# EAGLE board clvHd-Panel (EAGLE 9.6.2), part 1 of 3
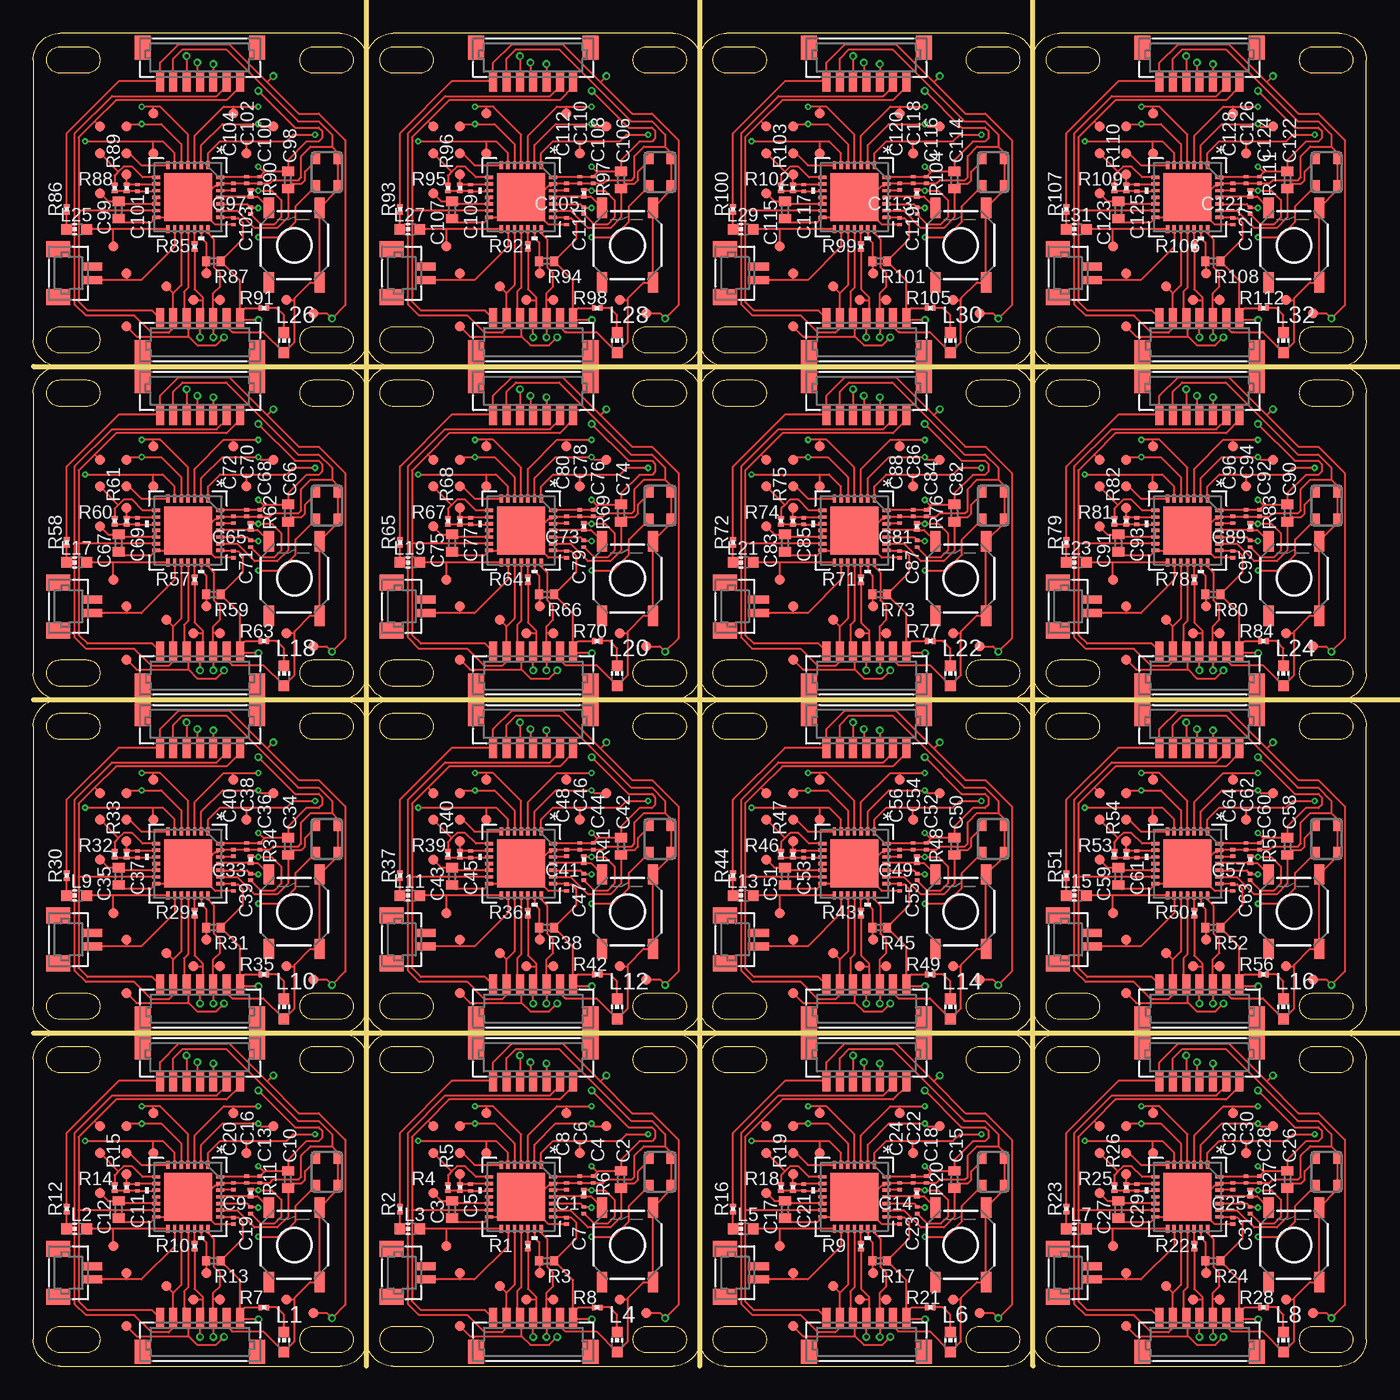
[diagram p0: board, top side]
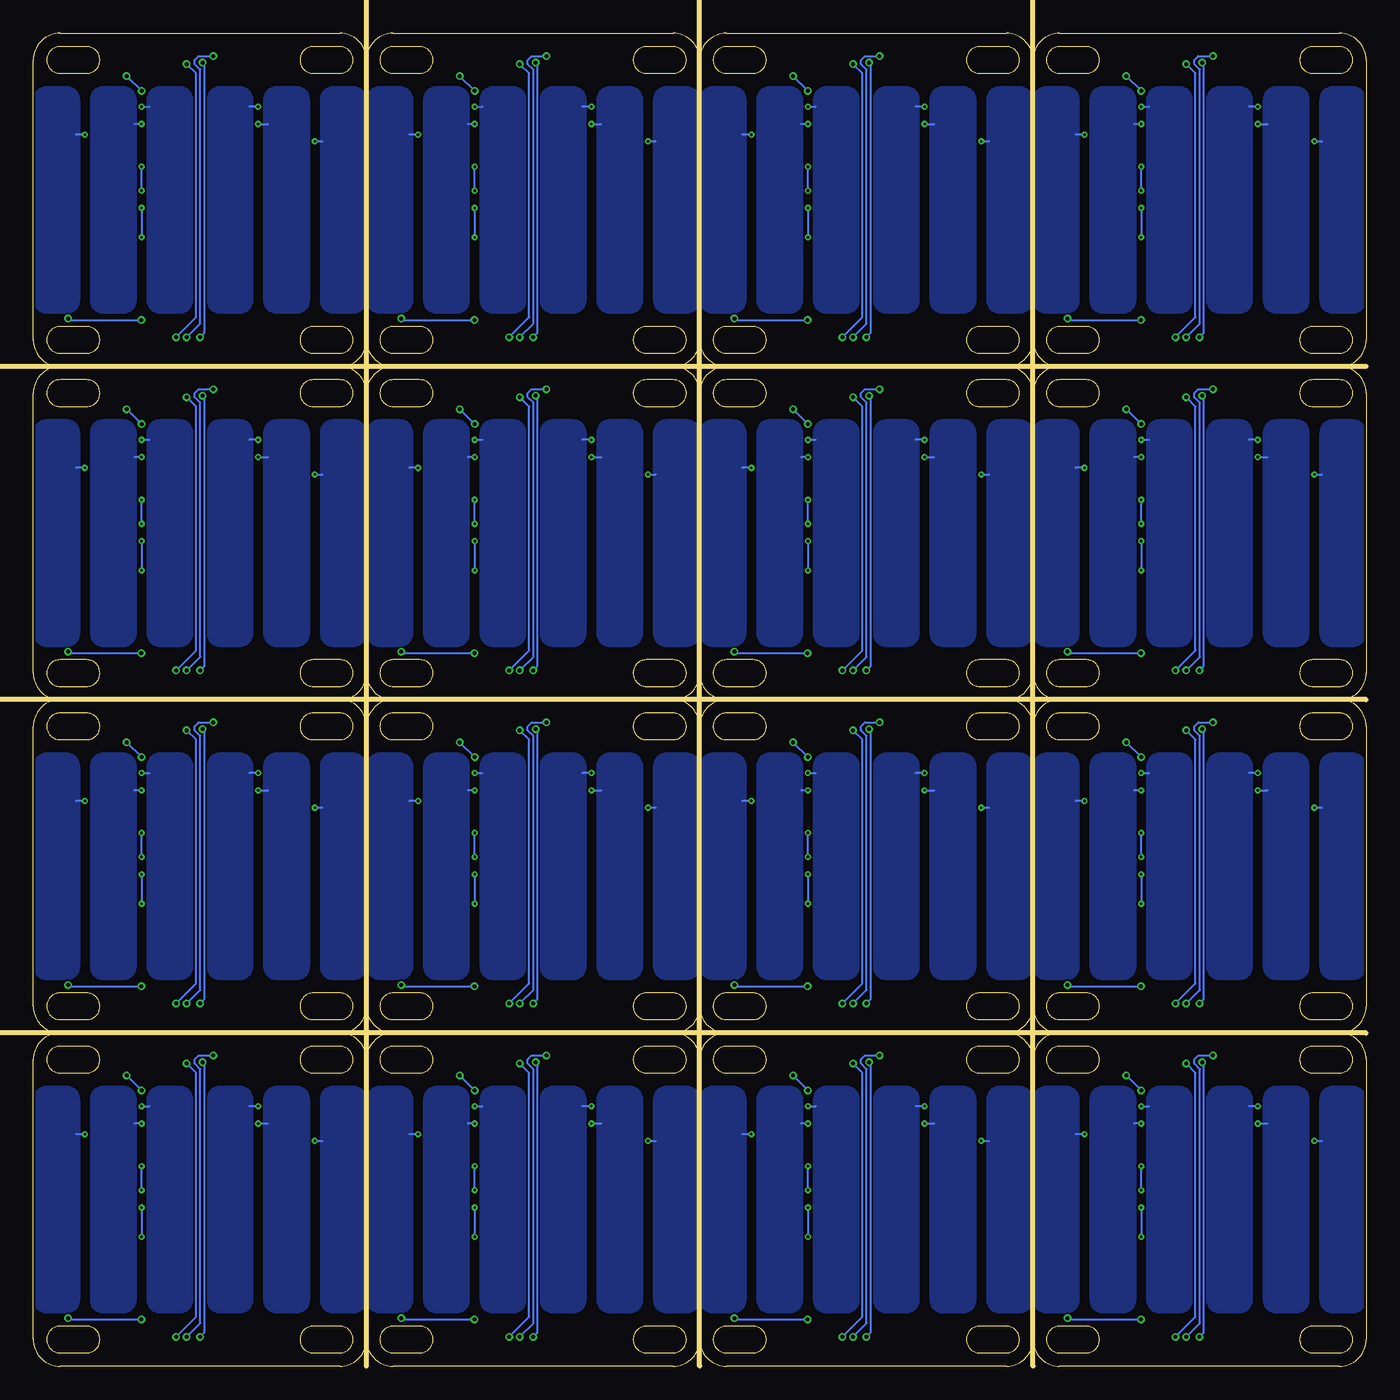
[diagram p1: board, bottom side, seen from below]

Size 100 x 100 mm. Coordinates in mm from the lower left corner, seen from the top.
Outline: 512 segments
Copper layers (1*16): Top 0.035mm / dielectric 1.5mm / Bottom 0.035mm
Design rules "clvHd": minimum track width 5mil, minimum drill 0.2mm, track to track 5mil, track to pad 5mil, pad to pad 5mil, via to via 5mil, smd to smd 5mil, copper to edge 7mil, drill to drill 7mil, minimum pad ring 5mil, minimum via ring 5mil, stop-mask expansion 2.5mil, vias tented up to drill 25mil, thermal gap 10mil
Milling: 6 lines

## Footprints (pad centres in the part's own frame; a part is rotated, then mirrored left to right if it is on the bottom)
C0201 = smd 0.25 x 0.35: 1 -0.25,0; 2 0.25,0
C0402 = smd 0.7 x 0.9: 1 -0.65,0; 2 0.65,0
CHIP-LED0603 = smd 0.8 x 0.8: A 0,-0.75; C 0,0.75
R0201 = smd 0.28 x 0.43: 1 -0.255,0; 2 0.255,0
R0402 = smd 0.6 x 0.7: 1 -0.55,0; 2 0.55,0
TACTILE-SWITCH-SMD = smd 1.524 x 0.762: 1 -2.794,1.905; 2 2.794,1.905; 3 -2.794,-1.905; 4 2.794,-1.905
PAD.03X.03 = smd 0.762 x 0.762: 1 0,0
RSG28_3P6X3P6_TEX = smd 0.6 x 0.25: 1 -2.4,1.5; 2 -2.4,1; 3 -2.4,0.5; 4 -2.4,0; 5 -2.4,-0.5; 6 -2.4,-1; 7 -2.4,-1.5; 15 2.4,-1.5; 16 2.4,-1; 17 2.4,-0.5; 18 2.4,0; 19 2.4,0.5; 20 2.4,1; 21 2.4,1.5 | smd 0.25 x 0.6: 8 -1.5,-2.4; 9 -1,-2.4; 10 -0.5,-2.4; 11 0,-2.4; 12 0.5,-2.4; 13 1,-2.4; 14 1.5,-2.4; 22 1.5,2.4; 23 1,2.4; 24 0.5,2.4; 25 0,2.4; 26 -0.5,2.4; 27 -1,2.4; 28 -1.5,2.4 | smd 3.6 x 3.6: 29 0,0
ASE = smd 0.9 x 0.65: 1 -1.05,-0.825; 2 1.05,-0.825; 3 1.05,0.825; 4 -1.05,0.825
BM02B-SRSS-TB = smd 0.6 x 1.55: 1 0.5,0; 2 -0.5,0 | smd 1.2 x 1.8: M1 1.8,-2.525; M2 -1.8,-2.525
BM07B-SRSS-TB = smd 0.6 x 1.55: 1 3,0; 2 2,0; 3 1,0; 4 0,0; 5 -1,0; 6 -2,0; 7 -3,0 | smd 1.2 x 1.8: M1 4.3,-2.525; M2 -4.3,-2.525

## Placement (x,y rotation side)
C1  22pF  [C0201]  41.3,11.7 90 top
C2  22pF  [C0402]  44.1,14 270 top
C3  100nF  [C0402]  31.4,11.75 270 top
C4  100nF  [C0201]  42,14 270 top
C5  1nF  [C0201]  32.8,13.4 90 top
C6  100nF  [C0201]  41,14 270 top
C7  100nF  [C0201]  40,10.9 270 top
C8  1000nF  [C0201]  40,13.5 90 top
C9  22pF  [C0201]  16.3,11.7 90 top
C10  22pF  [C0402]  19.1,14 270 top
C11  1nF  [C0201]  7.8,13.4 90 top
C12  100nF  [C0402]  6.4,11.75 270 top
C13  100nF  [C0201]  17,14 270 top
C14  22pF  [C0201]  66.3,11.7 90 top
C15  22pF  [C0402]  69.1,14 270 top
C16  100nF  [C0201]  16,14 270 top
C17  100nF  [C0402]  56.4,11.75 270 top
C18  100nF  [C0201]  67,14 270 top
C19  100nF  [C0201]  15,10.9 270 top
C20  1000nF  [C0201]  15,13.5 90 top
C21  1nF  [C0201]  57.8,13.4 90 top
C22  100nF  [C0201]  66,14 270 top
C23  100nF  [C0201]  65,10.9 270 top
C24  1000nF  [C0201]  65,13.5 90 top
C25  22pF  [C0201]  91.3,11.7 90 top
C26  22pF  [C0402]  94.1,14 270 top
C27  100nF  [C0402]  81.4,11.75 270 top
C28  100nF  [C0201]  92,14 270 top
C29  1nF  [C0201]  82.8,13.4 90 top
C30  100nF  [C0201]  91,14 270 top
C31  100nF  [C0201]  90,10.9 270 top
C32  1000nF  [C0201]  90,13.5 90 top
C33  22pF  [C0201]  16.3,36.7 90 top
C34  22pF  [C0402]  19.1,39 270 top
C35  100nF  [C0402]  6.4,36.75 270 top
C36  100nF  [C0201]  17,39 270 top
C37  1nF  [C0201]  7.8,38.4 90 top
C38  100nF  [C0201]  16,39 270 top
C39  100nF  [C0201]  15,35.9 270 top
C40  1000nF  [C0201]  15,38.5 90 top
C41  22pF  [C0201]  41.3,36.7 90 top
C42  22pF  [C0402]  44.1,39 270 top
C43  100nF  [C0402]  31.4,36.75 270 top
C44  100nF  [C0201]  42,39 270 top
C45  1nF  [C0201]  32.8,38.4 90 top
C46  100nF  [C0201]  41,39 270 top
C47  100nF  [C0201]  40,35.9 270 top
C48  1000nF  [C0201]  40,38.5 90 top
C49  22pF  [C0201]  66.3,36.7 90 top
C50  22pF  [C0402]  69.1,39 270 top
C51  100nF  [C0402]  56.4,36.75 270 top
C52  100nF  [C0201]  67,39 270 top
C53  1nF  [C0201]  57.8,38.4 90 top
C54  100nF  [C0201]  66,39 270 top
C55  100nF  [C0201]  65,35.9 270 top
C56  1000nF  [C0201]  65,38.5 90 top
C57  22pF  [C0201]  91.3,36.7 90 top
C58  22pF  [C0402]  94.1,39 270 top
C59  100nF  [C0402]  81.4,36.75 270 top
C60  100nF  [C0201]  92,39 270 top
C61  1nF  [C0201]  82.8,38.4 90 top
C62  100nF  [C0201]  91,39 270 top
C63  100nF  [C0201]  90,35.9 270 top
C64  1000nF  [C0201]  90,38.5 90 top
C65  22pF  [C0201]  16.3,61.7 90 top
C66  22pF  [C0402]  19.1,64 270 top
C67  100nF  [C0402]  6.4,61.75 270 top
C68  100nF  [C0201]  17,64 270 top
C69  1nF  [C0201]  7.8,63.4 90 top
C70  100nF  [C0201]  16,64 270 top
C71  100nF  [C0201]  15,60.9 270 top
C72  1000nF  [C0201]  15,63.5 90 top
C73  22pF  [C0201]  41.3,61.7 90 top
C74  22pF  [C0402]  44.1,64 270 top
C75  100nF  [C0402]  31.4,61.75 270 top
C76  100nF  [C0201]  42,64 270 top
C77  1nF  [C0201]  32.8,63.4 90 top
C78  100nF  [C0201]  41,64 270 top
C79  100nF  [C0201]  40,60.9 270 top
C80  1000nF  [C0201]  40,63.5 90 top
C81  22pF  [C0201]  66.3,61.7 90 top
C82  22pF  [C0402]  69.1,64 270 top
C83  100nF  [C0402]  56.4,61.75 270 top
C84  100nF  [C0201]  67,64 270 top
C85  1nF  [C0201]  57.8,63.4 90 top
C86  100nF  [C0201]  66,64 270 top
C87  100nF  [C0201]  65,60.9 270 top
C88  1000nF  [C0201]  65,63.5 90 top
C89  22pF  [C0201]  91.3,61.7 90 top
C90  22pF  [C0402]  94.1,64 270 top
C91  100nF  [C0402]  81.4,61.75 270 top
C92  100nF  [C0201]  92,64 270 top
C93  1nF  [C0201]  82.8,63.4 90 top
C94  100nF  [C0201]  91,64 270 top
C95  100nF  [C0201]  90,60.9 270 top
C96  1000nF  [C0201]  90,63.5 90 top
C97  22pF  [C0201]  16.3,86.7 90 top
C98  22pF  [C0402]  19.1,89 270 top
C99  100nF  [C0402]  6.4,86.75 270 top
C100  100nF  [C0201]  17,89 270 top
C101  1nF  [C0201]  7.8,88.4 90 top
C102  100nF  [C0201]  16,89 270 top
C103  100nF  [C0201]  15,85.9 270 top
C104  1000nF  [C0201]  15,88.5 90 top
C105  22pF  [C0201]  41.3,86.7 90 top
C106  22pF  [C0402]  44.1,89 270 top
C107  100nF  [C0402]  31.4,86.75 270 top
C108  100nF  [C0201]  42,89 270 top
C109  1nF  [C0201]  32.8,88.4 90 top
C110  100nF  [C0201]  41,89 270 top
C111  100nF  [C0201]  40,85.9 270 top
C112  1000nF  [C0201]  40,88.5 90 top
C113  22pF  [C0201]  66.3,86.7 90 top
C114  22pF  [C0402]  69.1,89 270 top
C115  100nF  [C0402]  56.4,86.75 270 top
C116  100nF  [C0201]  67,89 270 top
C117  1nF  [C0201]  57.8,88.4 90 top
C118  100nF  [C0201]  66,89 270 top
C119  100nF  [C0201]  65,85.9 270 top
C120  1000nF  [C0201]  65,88.5 90 top
C121  22pF  [C0201]  91.3,86.7 90 top
C122  22pF  [C0402]  94.1,89 270 top
C123  100nF  [C0402]  81.4,86.75 270 top
C124  100nF  [C0201]  92,89 270 top
C125  1nF  [C0201]  82.8,88.4 90 top
C126  100nF  [C0201]  91,89 270 top
C127  100nF  [C0201]  90,85.9 270 top
C128  1000nF  [C0201]  90,88.5 90 top
L1  [CHIP-LED0603]  18.8,1.8 0 top
L2  [CHIP-LED0603]  3.26,10.3 90 top
L3  [CHIP-LED0603]  28.26,10.3 90 top
L4  [CHIP-LED0603]  43.8,1.8 0 top
L5  [CHIP-LED0603]  53.26,10.3 90 top
L6  [CHIP-LED0603]  68.8,1.8 0 top
L7  [CHIP-LED0603]  78.26,10.3 90 top
L8  [CHIP-LED0603]  93.8,1.8 0 top
L9  [CHIP-LED0603]  3.26,35.3 90 top
L10  [CHIP-LED0603]  18.8,26.8 0 top
L11  [CHIP-LED0603]  28.26,35.3 90 top
L12  [CHIP-LED0603]  43.8,26.8 0 top
L13  [CHIP-LED0603]  53.26,35.3 90 top
L14  [CHIP-LED0603]  68.8,26.8 0 top
L15  [CHIP-LED0603]  78.26,35.3 90 top
L16  [CHIP-LED0603]  93.8,26.8 0 top
L17  [CHIP-LED0603]  3.26,60.3 90 top
L18  [CHIP-LED0603]  18.8,51.8 0 top
L19  [CHIP-LED0603]  28.26,60.3 90 top
L20  [CHIP-LED0603]  43.8,51.8 0 top
L21  [CHIP-LED0603]  53.26,60.3 90 top
L22  [CHIP-LED0603]  68.8,51.8 0 top
L23  [CHIP-LED0603]  78.26,60.3 90 top
L24  [CHIP-LED0603]  93.8,51.8 0 top
L25  [CHIP-LED0603]  3.26,85.3 90 top
L26  [CHIP-LED0603]  18.8,76.8 0 top
L27  [CHIP-LED0603]  28.26,85.3 90 top
L28  [CHIP-LED0603]  43.8,76.8 0 top
L29  [CHIP-LED0603]  53.26,85.3 90 top
L30  [CHIP-LED0603]  68.8,76.8 0 top
L31  [CHIP-LED0603]  78.26,85.3 90 top
L32  [CHIP-LED0603]  93.8,76.8 0 top
R1  51  [R0201]  37.1,9 270 top
R2  400  [R0201]  27.5,11.8 90 top
R3  1M  [R0402]  38.5,7.9 0 top
R4  10k  [R0201]  31.1,13.4 270 top
R5  10M  [R0201]  32,13.4 270 top
R6  1M  [R0201]  41.3,13 90 top
R7  400  [R0201]  17.3,4.4 0 top
R8  400  [R0201]  42.3,4.4 0 top
R9  51  [R0201]  62.1,9 270 top
R10  51  [R0201]  12.1,9 270 top
R11  1M  [R0201]  16.3,13 90 top
R12  400  [R0201]  2.5,11.8 90 top
R13  1M  [R0402]  13.5,7.9 0 top
R14  10k  [R0201]  6.1,13.4 270 top
R15  10M  [R0201]  7,13.4 270 top
R16  400  [R0201]  52.5,11.8 90 top
R17  1M  [R0402]  63.5,7.9 0 top
R18  10k  [R0201]  56.1,13.4 270 top
R19  10M  [R0201]  57,13.4 270 top
R20  1M  [R0201]  66.3,13 90 top
R21  400  [R0201]  67.3,4.4 0 top
R22  51  [R0201]  87.1,9 270 top
R23  400  [R0201]  77.5,11.8 90 top
R24  1M  [R0402]  88.5,7.9 0 top
R25  10k  [R0201]  81.1,13.4 270 top
R26  10M  [R0201]  82,13.4 270 top
R27  1M  [R0201]  91.3,13 90 top
R28  400  [R0201]  92.3,4.4 0 top
R29  51  [R0201]  12.1,34 270 top
R30  400  [R0201]  2.5,36.8 90 top
R31  1M  [R0402]  13.5,32.9 0 top
R32  10k  [R0201]  6.1,38.4 270 top
R33  10M  [R0201]  7,38.4 270 top
R34  1M  [R0201]  16.3,38 90 top
R35  400  [R0201]  17.3,29.4 0 top
R36  51  [R0201]  37.1,34 270 top
R37  400  [R0201]  27.5,36.8 90 top
R38  1M  [R0402]  38.5,32.9 0 top
R39  10k  [R0201]  31.1,38.4 270 top
R40  10M  [R0201]  32,38.4 270 top
R41  1M  [R0201]  41.3,38 90 top
R42  400  [R0201]  42.3,29.4 0 top
R43  51  [R0201]  62.1,34 270 top
R44  400  [R0201]  52.5,36.8 90 top
R45  1M  [R0402]  63.5,32.9 0 top
R46  10k  [R0201]  56.1,38.4 270 top
R47  10M  [R0201]  57,38.4 270 top
R48  1M  [R0201]  66.3,38 90 top
R49  400  [R0201]  67.3,29.4 0 top
R50  51  [R0201]  87.1,34 270 top
R51  400  [R0201]  77.5,36.8 90 top
R52  1M  [R0402]  88.5,32.9 0 top
R53  10k  [R0201]  81.1,38.4 270 top
R54  10M  [R0201]  82,38.4 270 top
R55  1M  [R0201]  91.3,38 90 top
R56  400  [R0201]  92.3,29.4 0 top
R57  51  [R0201]  12.1,59 270 top
R58  400  [R0201]  2.5,61.8 90 top
R59  1M  [R0402]  13.5,57.9 0 top
R60  10k  [R0201]  6.1,63.4 270 top
R61  10M  [R0201]  7,63.4 270 top
R62  1M  [R0201]  16.3,63 90 top
R63  400  [R0201]  17.3,54.4 0 top
R64  51  [R0201]  37.1,59 270 top
R65  400  [R0201]  27.5,61.8 90 top
R66  1M  [R0402]  38.5,57.9 0 top
R67  10k  [R0201]  31.1,63.4 270 top
R68  10M  [R0201]  32,63.4 270 top
R69  1M  [R0201]  41.3,63 90 top
R70  400  [R0201]  42.3,54.4 0 top
R71  51  [R0201]  62.1,59 270 top
R72  400  [R0201]  52.5,61.8 90 top
R73  1M  [R0402]  63.5,57.9 0 top
R74  10k  [R0201]  56.1,63.4 270 top
R75  10M  [R0201]  57,63.4 270 top
R76  1M  [R0201]  66.3,63 90 top
R77  400  [R0201]  67.3,54.4 0 top
R78  51  [R0201]  87.1,59 270 top
R79  400  [R0201]  77.5,61.8 90 top
R80  1M  [R0402]  88.5,57.9 0 top
R81  10k  [R0201]  81.1,63.4 270 top
R82  10M  [R0201]  82,63.4 270 top
R83  1M  [R0201]  91.3,63 90 top
R84  400  [R0201]  92.3,54.4 0 top
R85  51  [R0201]  12.1,84 270 top
R86  400  [R0201]  2.5,86.8 90 top
R87  1M  [R0402]  13.5,82.9 0 top
R88  10k  [R0201]  6.1,88.4 270 top
R89  10M  [R0201]  7,88.4 270 top
R90  1M  [R0201]  16.3,88 90 top
R91  400  [R0201]  17.3,79.4 0 top
R92  51  [R0201]  37.1,84 270 top
R93  400  [R0201]  27.5,86.8 90 top
R94  1M  [R0402]  38.5,82.9 0 top
R95  10k  [R0201]  31.1,88.4 270 top
R96  10M  [R0201]  32,88.4 270 top
R97  1M  [R0201]  41.3,88 90 top
R98  400  [R0201]  42.3,79.4 0 top
R99  51  [R0201]  62.1,84 270 top
R100  400  [R0201]  52.5,86.8 90 top
R101  1M  [R0402]  63.5,82.9 0 top
R102  10k  [R0201]  56.1,88.4 270 top
R103  10M  [R0201]  57,88.4 270 top
R104  1M  [R0201]  66.3,88 90 top
R105  400  [R0201]  67.3,79.4 0 top
R106  51  [R0201]  87.1,84 270 top
R107  400  [R0201]  77.5,86.8 90 top
R108  1M  [R0402]  88.5,82.9 0 top
R109  10k  [R0201]  81.1,88.4 270 top
R110  10M  [R0201]  82,88.4 270 top
R111  1M  [R0201]  91.3,88 90 top
R112  400  [R0201]  92.3,79.4 0 top
S1  TAC_SWITCHSMD  [TACTILE-SWITCH-SMD]  19.58,9.1 90 top
S2  TAC_SWITCHSMD  [TACTILE-SWITCH-SMD]  44.58,9.1 90 top
S3  TAC_SWITCHSMD  [TACTILE-SWITCH-SMD]  69.58,9.1 90 top
S4  TAC_SWITCHSMD  [TACTILE-SWITCH-SMD]  94.58,9.1 90 top
S5  TAC_SWITCHSMD  [TACTILE-SWITCH-SMD]  19.58,34.1 90 top
S6  TAC_SWITCHSMD  [TACTILE-SWITCH-SMD]  44.58,34.1 90 top
S7  TAC_SWITCHSMD  [TACTILE-SWITCH-SMD]  69.58,34.1 90 top
S8  TAC_SWITCHSMD  [TACTILE-SWITCH-SMD]  94.58,34.1 90 top
S9  TAC_SWITCHSMD  [TACTILE-SWITCH-SMD]  19.58,59.1 90 top
S10  TAC_SWITCHSMD  [TACTILE-SWITCH-SMD]  44.58,59.1 90 top
S11  TAC_SWITCHSMD  [TACTILE-SWITCH-SMD]  69.58,59.1 90 top
S12  TAC_SWITCHSMD  [TACTILE-SWITCH-SMD]  94.58,59.1 90 top
S13  TAC_SWITCHSMD  [TACTILE-SWITCH-SMD]  19.58,84.1 90 top
S14  TAC_SWITCHSMD  [TACTILE-SWITCH-SMD]  44.58,84.1 90 top
S15  TAC_SWITCHSMD  [TACTILE-SWITCH-SMD]  69.58,84.1 90 top
S16  TAC_SWITCHSMD  [TACTILE-SWITCH-SMD]  94.58,84.1 90 top
TP1  TEST-POINT3  [PAD.03X.03]  13,7 0 top
TP2  TEST-POINT3  [PAD.03X.03]  6,9 0 top
TP3  TEST-POINT3  [PAD.03X.03]  21,4 0 top
TP4  TEST-POINT3  [PAD.03X.03]  19,5 0 top
TP5  TEST-POINT3  [PAD.03X.03]  10,6 0 top
TP6  TEST-POINT3  [PAD.03X.03]  12,5 0 top
TP7  TEST-POINT3  [PAD.03X.03]  7,3 0 top
TP8  TEST-POINT3  [PAD.03X.03]  5,18 0 top
TP9  TEST-POINT3  [PAD.03X.03]  14,5 0 top
TP10  TEST-POINT3  [PAD.03X.03]  7,7 0 top
TP11  TEST-POINT3  [PAD.03X.03]  7,16 0 top
TP12  TEST-POINT3  [PAD.03X.03]  5,16 0 top
TP13  TEST-POINT3  [PAD.03X.03]  9,16 0 top
TP14  TEST-POINT3  [PAD.03X.03]  7,18 0 top
TP15  TEST-POINT3  [PAD.03X.03]  9,19 0 top
TP16  TEST-POINT3  [PAD.03X.03]  15,19 0 top
TP17  TEST-POINT3  [PAD.03X.03]  18,18 0 top
TP18  TEST-POINT3  [PAD.03X.03]  16,16 0 top
TP19  TEST-POINT3  [PAD.03X.03]  7,14.4 0 top
TP20  TEST-POINT3  [PAD.03X.03]  5,13 0 top
TP21  TEST-POINT3  [PAD.03X.03]  38,7 0 top
TP22  TEST-POINT3  [PAD.03X.03]  31,9 0 top
TP23  TEST-POINT3  [PAD.03X.03]  46,4 0 top
TP24  TEST-POINT3  [PAD.03X.03]  44,5 0 top
TP25  TEST-POINT3  [PAD.03X.03]  35,6 0 top
TP26  TEST-POINT3  [PAD.03X.03]  37,5 0 top
TP27  TEST-POINT3  [PAD.03X.03]  32,3 0 top
TP28  TEST-POINT3  [PAD.03X.03]  30,18 0 top
TP29  TEST-POINT3  [PAD.03X.03]  39,5 0 top
TP30  TEST-POINT3  [PAD.03X.03]  32,7 0 top
TP31  TEST-POINT3  [PAD.03X.03]  32,16 0 top
TP32  TEST-POINT3  [PAD.03X.03]  30,16 0 top
TP33  TEST-POINT3  [PAD.03X.03]  34,16 0 top
TP34  TEST-POINT3  [PAD.03X.03]  32,18 0 top
TP35  TEST-POINT3  [PAD.03X.03]  34,19 0 top
TP36  TEST-POINT3  [PAD.03X.03]  40,19 0 top
TP37  TEST-POINT3  [PAD.03X.03]  43,18 0 top
TP38  TEST-POINT3  [PAD.03X.03]  41,16 0 top
TP39  TEST-POINT3  [PAD.03X.03]  32,14.4 0 top
TP40  TEST-POINT3  [PAD.03X.03]  30,13 0 top
TP41  TEST-POINT3  [PAD.03X.03]  63,7 0 top
TP42  TEST-POINT3  [PAD.03X.03]  56,9 0 top
TP43  TEST-POINT3  [PAD.03X.03]  71,4 0 top
TP44  TEST-POINT3  [PAD.03X.03]  69,5 0 top
TP45  TEST-POINT3  [PAD.03X.03]  60,6 0 top
TP46  TEST-POINT3  [PAD.03X.03]  62,5 0 top
TP47  TEST-POINT3  [PAD.03X.03]  57,3 0 top
TP48  TEST-POINT3  [PAD.03X.03]  55,18 0 top
TP49  TEST-POINT3  [PAD.03X.03]  64,5 0 top
TP50  TEST-POINT3  [PAD.03X.03]  57,7 0 top
TP51  TEST-POINT3  [PAD.03X.03]  57,16 0 top
TP52  TEST-POINT3  [PAD.03X.03]  55,16 0 top
TP53  TEST-POINT3  [PAD.03X.03]  59,16 0 top
TP54  TEST-POINT3  [PAD.03X.03]  57,18 0 top
TP55  TEST-POINT3  [PAD.03X.03]  59,19 0 top
TP56  TEST-POINT3  [PAD.03X.03]  65,19 0 top
TP57  TEST-POINT3  [PAD.03X.03]  68,18 0 top
TP58  TEST-POINT3  [PAD.03X.03]  66,16 0 top
TP59  TEST-POINT3  [PAD.03X.03]  57,14.4 0 top
TP60  TEST-POINT3  [PAD.03X.03]  55,13 0 top
TP61  TEST-POINT3  [PAD.03X.03]  88,7 0 top
TP62  TEST-POINT3  [PAD.03X.03]  81,9 0 top
TP63  TEST-POINT3  [PAD.03X.03]  96,4 0 top
TP64  TEST-POINT3  [PAD.03X.03]  94,5 0 top
TP65  TEST-POINT3  [PAD.03X.03]  85,6 0 top
TP66  TEST-POINT3  [PAD.03X.03]  87,5 0 top
TP67  TEST-POINT3  [PAD.03X.03]  82,3 0 top
TP68  TEST-POINT3  [PAD.03X.03]  80,18 0 top
TP69  TEST-POINT3  [PAD.03X.03]  89,5 0 top
TP70  TEST-POINT3  [PAD.03X.03]  82,7 0 top
TP71  TEST-POINT3  [PAD.03X.03]  82,16 0 top
TP72  TEST-POINT3  [PAD.03X.03]  80,16 0 top
TP73  TEST-POINT3  [PAD.03X.03]  84,16 0 top
TP74  TEST-POINT3  [PAD.03X.03]  82,18 0 top
TP75  TEST-POINT3  [PAD.03X.03]  84,19 0 top
TP76  TEST-POINT3  [PAD.03X.03]  90,19 0 top
TP77  TEST-POINT3  [PAD.03X.03]  93,18 0 top
TP78  TEST-POINT3  [PAD.03X.03]  91,16 0 top
TP79  TEST-POINT3  [PAD.03X.03]  82,14.4 0 top
TP80  TEST-POINT3  [PAD.03X.03]  80,13 0 top
TP81  TEST-POINT3  [PAD.03X.03]  13,32 0 top
TP82  TEST-POINT3  [PAD.03X.03]  6,34 0 top
TP83  TEST-POINT3  [PAD.03X.03]  21,29 0 top
TP84  TEST-POINT3  [PAD.03X.03]  19,30 0 top
TP85  TEST-POINT3  [PAD.03X.03]  10,31 0 top
TP86  TEST-POINT3  [PAD.03X.03]  12,30 0 top
TP87  TEST-POINT3  [PAD.03X.03]  7,28 0 top
TP88  TEST-POINT3  [PAD.03X.03]  5,43 0 top
TP89  TEST-POINT3  [PAD.03X.03]  14,30 0 top
TP90  TEST-POINT3  [PAD.03X.03]  7,32 0 top
TP91  TEST-POINT3  [PAD.03X.03]  7,41 0 top
TP92  TEST-POINT3  [PAD.03X.03]  5,41 0 top
TP93  TEST-POINT3  [PAD.03X.03]  9,41 0 top
TP94  TEST-POINT3  [PAD.03X.03]  7,43 0 top
TP95  TEST-POINT3  [PAD.03X.03]  9,44 0 top
TP96  TEST-POINT3  [PAD.03X.03]  15,44 0 top
TP97  TEST-POINT3  [PAD.03X.03]  18,43 0 top
TP98  TEST-POINT3  [PAD.03X.03]  16,41 0 top
TP99  TEST-POINT3  [PAD.03X.03]  7,39.4 0 top
TP100  TEST-POINT3  [PAD.03X.03]  5,38 0 top
TP101  TEST-POINT3  [PAD.03X.03]  38,32 0 top
TP102  TEST-POINT3  [PAD.03X.03]  31,34 0 top
TP103  TEST-POINT3  [PAD.03X.03]  46,29 0 top
TP104  TEST-POINT3  [PAD.03X.03]  44,30 0 top
TP105  TEST-POINT3  [PAD.03X.03]  35,31 0 top
TP106  TEST-POINT3  [PAD.03X.03]  37,30 0 top
TP107  TEST-POINT3  [PAD.03X.03]  32,28 0 top
TP108  TEST-POINT3  [PAD.03X.03]  30,43 0 top
TP109  TEST-POINT3  [PAD.03X.03]  39,30 0 top
TP110  TEST-POINT3  [PAD.03X.03]  32,32 0 top
TP111  TEST-POINT3  [PAD.03X.03]  32,41 0 top
TP112  TEST-POINT3  [PAD.03X.03]  30,41 0 top
TP113  TEST-POINT3  [PAD.03X.03]  34,41 0 top
TP114  TEST-POINT3  [PAD.03X.03]  32,43 0 top
TP115  TEST-POINT3  [PAD.03X.03]  34,44 0 top
TP116  TEST-POINT3  [PAD.03X.03]  40,44 0 top
TP117  TEST-POINT3  [PAD.03X.03]  43,43 0 top
TP118  TEST-POINT3  [PAD.03X.03]  41,41 0 top
TP119  TEST-POINT3  [PAD.03X.03]  32,39.4 0 top
TP120  TEST-POINT3  [PAD.03X.03]  30,38 0 top
TP121  TEST-POINT3  [PAD.03X.03]  63,32 0 top
TP122  TEST-POINT3  [PAD.03X.03]  56,34 0 top
TP123  TEST-POINT3  [PAD.03X.03]  71,29 0 top
TP124  TEST-POINT3  [PAD.03X.03]  69,30 0 top
TP125  TEST-POINT3  [PAD.03X.03]  60,31 0 top
TP126  TEST-POINT3  [PAD.03X.03]  62,30 0 top
TP127  TEST-POINT3  [PAD.03X.03]  57,28 0 top
TP128  TEST-POINT3  [PAD.03X.03]  55,43 0 top
TP129  TEST-POINT3  [PAD.03X.03]  64,30 0 top
TP130  TEST-POINT3  [PAD.03X.03]  57,32 0 top
TP131  TEST-POINT3  [PAD.03X.03]  57,41 0 top
TP132  TEST-POINT3  [PAD.03X.03]  55,41 0 top
TP133  TEST-POINT3  [PAD.03X.03]  59,41 0 top
TP134  TEST-POINT3  [PAD.03X.03]  57,43 0 top
TP135  TEST-POINT3  [PAD.03X.03]  59,44 0 top
TP136  TEST-POINT3  [PAD.03X.03]  65,44 0 top
TP137  TEST-POINT3  [PAD.03X.03]  68,43 0 top
TP138  TEST-POINT3  [PAD.03X.03]  66,41 0 top
TP139  TEST-POINT3  [PAD.03X.03]  57,39.4 0 top
TP140  TEST-POINT3  [PAD.03X.03]  55,38 0 top
TP141  TEST-POINT3  [PAD.03X.03]  88,32 0 top
TP142  TEST-POINT3  [PAD.03X.03]  81,34 0 top
TP143  TEST-POINT3  [PAD.03X.03]  96,29 0 top
TP144  TEST-POINT3  [PAD.03X.03]  94,30 0 top
TP145  TEST-POINT3  [PAD.03X.03]  85,31 0 top
TP146  TEST-POINT3  [PAD.03X.03]  87,30 0 top
TP147  TEST-POINT3  [PAD.03X.03]  82,28 0 top
TP148  TEST-POINT3  [PAD.03X.03]  80,43 0 top
TP149  TEST-POINT3  [PAD.03X.03]  89,30 0 top
TP150  TEST-POINT3  [PAD.03X.03]  82,32 0 top
TP151  TEST-POINT3  [PAD.03X.03]  82,41 0 top
TP152  TEST-POINT3  [PAD.03X.03]  80,41 0 top
TP153  TEST-POINT3  [PAD.03X.03]  84,41 0 top
TP154  TEST-POINT3  [PAD.03X.03]  82,43 0 top
TP155  TEST-POINT3  [PAD.03X.03]  84,44 0 top
TP156  TEST-POINT3  [PAD.03X.03]  90,44 0 top
TP157  TEST-POINT3  [PAD.03X.03]  93,43 0 top
TP158  TEST-POINT3  [PAD.03X.03]  91,41 0 top
TP159  TEST-POINT3  [PAD.03X.03]  82,39.4 0 top
TP160  TEST-POINT3  [PAD.03X.03]  80,38 0 top
TP161  TEST-POINT3  [PAD.03X.03]  13,57 0 top
TP162  TEST-POINT3  [PAD.03X.03]  6,59 0 top
TP163  TEST-POINT3  [PAD.03X.03]  21,54 0 top
TP164  TEST-POINT3  [PAD.03X.03]  19,55 0 top
TP165  TEST-POINT3  [PAD.03X.03]  10,56 0 top
TP166  TEST-POINT3  [PAD.03X.03]  12,55 0 top
TP167  TEST-POINT3  [PAD.03X.03]  7,53 0 top
TP168  TEST-POINT3  [PAD.03X.03]  5,68 0 top
TP169  TEST-POINT3  [PAD.03X.03]  14,55 0 top
TP170  TEST-POINT3  [PAD.03X.03]  7,57 0 top
TP171  TEST-POINT3  [PAD.03X.03]  7,66 0 top
TP172  TEST-POINT3  [PAD.03X.03]  5,66 0 top
TP173  TEST-POINT3  [PAD.03X.03]  9,66 0 top
TP174  TEST-POINT3  [PAD.03X.03]  7,68 0 top
TP175  TEST-POINT3  [PAD.03X.03]  9,69 0 top
TP176  TEST-POINT3  [PAD.03X.03]  15,69 0 top
TP177  TEST-POINT3  [PAD.03X.03]  18,68 0 top
TP178  TEST-POINT3  [PAD.03X.03]  16,66 0 top
TP179  TEST-POINT3  [PAD.03X.03]  7,64.4 0 top
TP180  TEST-POINT3  [PAD.03X.03]  5,63 0 top
TP181  TEST-POINT3  [PAD.03X.03]  38,57 0 top
TP182  TEST-POINT3  [PAD.03X.03]  31,59 0 top
TP183  TEST-POINT3  [PAD.03X.03]  46,54 0 top
TP184  TEST-POINT3  [PAD.03X.03]  44,55 0 top
TP185  TEST-POINT3  [PAD.03X.03]  35,56 0 top
TP186  TEST-POINT3  [PAD.03X.03]  37,55 0 top
TP187  TEST-POINT3  [PAD.03X.03]  32,53 0 top
TP188  TEST-POINT3  [PAD.03X.03]  30,68 0 top
TP189  TEST-POINT3  [PAD.03X.03]  39,55 0 top
TP190  TEST-POINT3  [PAD.03X.03]  32,57 0 top
TP191  TEST-POINT3  [PAD.03X.03]  32,66 0 top
TP192  TEST-POINT3  [PAD.03X.03]  30,66 0 top
TP193  TEST-POINT3  [PAD.03X.03]  34,66 0 top
TP194  TEST-POINT3  [PAD.03X.03]  32,68 0 top
TP195  TEST-POINT3  [PAD.03X.03]  34,69 0 top
TP196  TEST-POINT3  [PAD.03X.03]  40,69 0 top
TP197  TEST-POINT3  [PAD.03X.03]  43,68 0 top
TP198  TEST-POINT3  [PAD.03X.03]  41,66 0 top
TP199  TEST-POINT3  [PAD.03X.03]  32,64.4 0 top
TP200  TEST-POINT3  [PAD.03X.03]  30,63 0 top
TP201  TEST-POINT3  [PAD.03X.03]  63,57 0 top
TP202  TEST-POINT3  [PAD.03X.03]  56,59 0 top
TP203  TEST-POINT3  [PAD.03X.03]  71,54 0 top
TP204  TEST-POINT3  [PAD.03X.03]  69,55 0 top
TP205  TEST-POINT3  [PAD.03X.03]  60,56 0 top
TP206  TEST-POINT3  [PAD.03X.03]  62,55 0 top
TP207  TEST-POINT3  [PAD.03X.03]  57,53 0 top
TP208  TEST-POINT3  [PAD.03X.03]  55,68 0 top
TP209  TEST-POINT3  [PAD.03X.03]  64,55 0 top
TP210  TEST-POINT3  [PAD.03X.03]  57,57 0 top
TP211  TEST-POINT3  [PAD.03X.03]  57,66 0 top
TP212  TEST-POINT3  [PAD.03X.03]  55,66 0 top
TP213  TEST-POINT3  [PAD.03X.03]  59,66 0 top
TP214  TEST-POINT3  [PAD.03X.03]  57,68 0 top
TP215  TEST-POINT3  [PAD.03X.03]  59,69 0 top
TP216  TEST-POINT3  [PAD.03X.03]  65,69 0 top
TP217  TEST-POINT3  [PAD.03X.03]  68,68 0 top
TP218  TEST-POINT3  [PAD.03X.03]  66,66 0 top
TP219  TEST-POINT3  [PAD.03X.03]  57,64.4 0 top
TP220  TEST-POINT3  [PAD.03X.03]  55,63 0 top
TP221  TEST-POINT3  [PAD.03X.03]  88,57 0 top
TP222  TEST-POINT3  [PAD.03X.03]  81,59 0 top
TP223  TEST-POINT3  [PAD.03X.03]  96,54 0 top
TP224  TEST-POINT3  [PAD.03X.03]  94,55 0 top
TP225  TEST-POINT3  [PAD.03X.03]  85,56 0 top
TP226  TEST-POINT3  [PAD.03X.03]  87,55 0 top
TP227  TEST-POINT3  [PAD.03X.03]  82,53 0 top
TP228  TEST-POINT3  [PAD.03X.03]  80,68 0 top
TP229  TEST-POINT3  [PAD.03X.03]  89,55 0 top
TP230  TEST-POINT3  [PAD.03X.03]  82,57 0 top
TP231  TEST-POINT3  [PAD.03X.03]  82,66 0 top
TP232  TEST-POINT3  [PAD.03X.03]  80,66 0 top
TP233  TEST-POINT3  [PAD.03X.03]  84,66 0 top
TP234  TEST-POINT3  [PAD.03X.03]  82,68 0 top
TP235  TEST-POINT3  [PAD.03X.03]  84,69 0 top
TP236  TEST-POINT3  [PAD.03X.03]  90,69 0 top
TP237  TEST-POINT3  [PAD.03X.03]  93,68 0 top
TP238  TEST-POINT3  [PAD.03X.03]  91,66 0 top
TP239  TEST-POINT3  [PAD.03X.03]  82,64.4 0 top
TP240  TEST-POINT3  [PAD.03X.03]  80,63 0 top
TP241  TEST-POINT3  [PAD.03X.03]  13,82 0 top
TP242  TEST-POINT3  [PAD.03X.03]  6,84 0 top
TP243  TEST-POINT3  [PAD.03X.03]  21,79 0 top
TP244  TEST-POINT3  [PAD.03X.03]  19,80 0 top
TP245  TEST-POINT3  [PAD.03X.03]  10,81 0 top
TP246  TEST-POINT3  [PAD.03X.03]  12,80 0 top
TP247  TEST-POINT3  [PAD.03X.03]  7,78 0 top
TP248  TEST-POINT3  [PAD.03X.03]  5,93 0 top
TP249  TEST-POINT3  [PAD.03X.03]  14,80 0 top
TP250  TEST-POINT3  [PAD.03X.03]  7,82 0 top
TP251  TEST-POINT3  [PAD.03X.03]  7,91 0 top
TP252  TEST-POINT3  [PAD.03X.03]  5,91 0 top
TP253  TEST-POINT3  [PAD.03X.03]  9,91 0 top
TP254  TEST-POINT3  [PAD.03X.03]  7,93 0 top
TP255  TEST-POINT3  [PAD.03X.03]  9,94 0 top
TP256  TEST-POINT3  [PAD.03X.03]  15,94 0 top
TP257  TEST-POINT3  [PAD.03X.03]  18,93 0 top
TP258  TEST-POINT3  [PAD.03X.03]  16,91 0 top
TP259  TEST-POINT3  [PAD.03X.03]  7,89.4 0 top
TP260  TEST-POINT3  [PAD.03X.03]  5,88 0 top
TP261  TEST-POINT3  [PAD.03X.03]  38,82 0 top
TP262  TEST-POINT3  [PAD.03X.03]  31,84 0 top
TP263  TEST-POINT3  [PAD.03X.03]  46,79 0 top
TP264  TEST-POINT3  [PAD.03X.03]  44,80 0 top
TP265  TEST-POINT3  [PAD.03X.03]  35,81 0 top
TP266  TEST-POINT3  [PAD.03X.03]  37,80 0 top
TP267  TEST-POINT3  [PAD.03X.03]  32,78 0 top
TP268  TEST-POINT3  [PAD.03X.03]  30,93 0 top
TP269  TEST-POINT3  [PAD.03X.03]  39,80 0 top
TP270  TEST-POINT3  [PAD.03X.03]  32,82 0 top
TP271  TEST-POINT3  [PAD.03X.03]  32,91 0 top
TP272  TEST-POINT3  [PAD.03X.03]  30,91 0 top
TP273  TEST-POINT3  [PAD.03X.03]  34,91 0 top
TP274  TEST-POINT3  [PAD.03X.03]  32,93 0 top
TP275  TEST-POINT3  [PAD.03X.03]  34,94 0 top
TP276  TEST-POINT3  [PAD.03X.03]  40,94 0 top
TP277  TEST-POINT3  [PAD.03X.03]  43,93 0 top
TP278  TEST-POINT3  [PAD.03X.03]  41,91 0 top
TP279  TEST-POINT3  [PAD.03X.03]  32,89.4 0 top
TP280  TEST-POINT3  [PAD.03X.03]  30,88 0 top
TP281  TEST-POINT3  [PAD.03X.03]  63,82 0 top
TP282  TEST-POINT3  [PAD.03X.03]  56,84 0 top
TP283  TEST-POINT3  [PAD.03X.03]  71,79 0 top
TP284  TEST-POINT3  [PAD.03X.03]  69,80 0 top
TP285  TEST-POINT3  [PAD.03X.03]  60,81 0 top
TP286  TEST-POINT3  [PAD.03X.03]  62,80 0 top
TP287  TEST-POINT3  [PAD.03X.03]  57,78 0 top
TP288  TEST-POINT3  [PAD.03X.03]  55,93 0 top
TP289  TEST-POINT3  [PAD.03X.03]  64,80 0 top
TP290  TEST-POINT3  [PAD.03X.03]  57,82 0 top
TP291  TEST-POINT3  [PAD.03X.03]  57,91 0 top
TP292  TEST-POINT3  [PAD.03X.03]  55,91 0 top
TP293  TEST-POINT3  [PAD.03X.03]  59,91 0 top
TP294  TEST-POINT3  [PAD.03X.03]  57,93 0 top
TP295  TEST-POINT3  [PAD.03X.03]  59,94 0 top
TP296  TEST-POINT3  [PAD.03X.03]  65,94 0 top
TP297  TEST-POINT3  [PAD.03X.03]  68,93 0 top
TP298  TEST-POINT3  [PAD.03X.03]  66,91 0 top
TP299  TEST-POINT3  [PAD.03X.03]  57,89.4 0 top
TP300  TEST-POINT3  [PAD.03X.03]  55,88 0 top
TP301  TEST-POINT3  [PAD.03X.03]  88,82 0 top
TP302  TEST-POINT3  [PAD.03X.03]  81,84 0 top
TP303  TEST-POINT3  [PAD.03X.03]  96,79 0 top
TP304  TEST-POINT3  [PAD.03X.03]  94,80 0 top
TP305  TEST-POINT3  [PAD.03X.03]  85,81 0 top
TP306  TEST-POINT3  [PAD.03X.03]  87,80 0 top
TP307  TEST-POINT3  [PAD.03X.03]  82,78 0 top
TP308  TEST-POINT3  [PAD.03X.03]  80,93 0 top
TP309  TEST-POINT3  [PAD.03X.03]  89,80 0 top
TP310  TEST-POINT3  [PAD.03X.03]  82,82 0 top
TP311  TEST-POINT3  [PAD.03X.03]  82,91 0 top
TP312  TEST-POINT3  [PAD.03X.03]  80,91 0 top
TP313  TEST-POINT3  [PAD.03X.03]  84,91 0 top
TP314  TEST-POINT3  [PAD.03X.03]  82,93 0 top
TP315  TEST-POINT3  [PAD.03X.03]  84,94 0 top
TP316  TEST-POINT3  [PAD.03X.03]  90,94 0 top
TP317  TEST-POINT3  [PAD.03X.03]  93,93 0 top
TP318  TEST-POINT3  [PAD.03X.03]  91,91 0 top
TP319  TEST-POINT3  [PAD.03X.03]  82,89.4 0 top
TP320  TEST-POINT3  [PAD.03X.03]  80,88 0 top
U1  ADS1293CISQ/NOPB  [RSG28_3P6X3P6_TEX]  11.6,12.7 270 top
U2  ADS1293CISQ/NOPB  [RSG28_3P6X3P6_TEX]  36.6,12.7 270 top
U3  ADS1293CISQ/NOPB  [RSG28_3P6X3P6_TEX]  61.6,12.7 270 top
U4  ADS1293CISQ/NOPB  [RSG28_3P6X3P6_TEX]  86.6,12.7 270 top
U5  ADS1293CISQ/NOPB  [RSG28_3P6X3P6_TEX]  11.6,37.7 270 top
U6  ADS1293CISQ/NOPB  [RSG28_3P6X3P6_TEX]  36.6,37.7 270 top
U7  ADS1293CISQ/NOPB  [RSG28_3P6X3P6_TEX]  61.6,37.7 270 top
U8  ADS1293CISQ/NOPB  [RSG28_3P6X3P6_TEX]  86.6,37.7 270 top
U9  ADS1293CISQ/NOPB  [RSG28_3P6X3P6_TEX]  11.6,62.7 270 top
U10  ADS1293CISQ/NOPB  [RSG28_3P6X3P6_TEX]  36.6,62.7 270 top
U11  ADS1293CISQ/NOPB  [RSG28_3P6X3P6_TEX]  61.6,62.7 270 top
U12  ADS1293CISQ/NOPB  [RSG28_3P6X3P6_TEX]  86.6,62.7 270 top
U13  ADS1293CISQ/NOPB  [RSG28_3P6X3P6_TEX]  11.6,87.7 270 top
U14  ADS1293CISQ/NOPB  [RSG28_3P6X3P6_TEX]  36.6,87.7 270 top
U15  ADS1293CISQ/NOPB  [RSG28_3P6X3P6_TEX]  61.6,87.7 270 top
U16  ADS1293CISQ/NOPB  [RSG28_3P6X3P6_TEX]  86.6,87.7 270 top
U$1  ASE  [ASE]  22.02,14.57 90 top
U$2  ASE  [ASE]  47.02,14.57 90 top
U$3  ASE  [ASE]  72.02,14.57 90 top
U$4  ASE  [ASE]  97.02,14.57 90 top
U$5  ASE  [ASE]  22.02,39.57 90 top
U$6  ASE  [ASE]  47.02,39.57 90 top
U$7  ASE  [ASE]  72.02,39.57 90 top
U$8  ASE  [ASE]  97.02,39.57 90 top
U$9  ASE  [ASE]  22.02,64.57 90 top
U$10  ASE  [ASE]  47.02,64.57 90 top
U$11  ASE  [ASE]  72.02,64.57 90 top
U$12  ASE  [ASE]  97.02,64.57 90 top
U$13  ASE  [ASE]  22.02,89.57 90 top
U$14  ASE  [ASE]  47.02,89.57 90 top
U$15  ASE  [ASE]  72.02,89.57 90 top
U$16  ASE  [ASE]  97.02,89.57 90 top
X1  BM02B-SRSS-TB  [BM02B-SRSS-TB]  4.41,7 270 top
X2  BM07B-SRSS-TB  [BM07B-SRSS-TB]  12.5,3.61 0 top
X3  BM07B-SRSS-TB  [BM07B-SRSS-TB]  12.5,21.39 180 top
X4  BM02B-SRSS-TB  [BM02B-SRSS-TB]  29.41,7 270 top
X5  BM07B-SRSS-TB  [BM07B-SRSS-TB]  37.5,3.61 0 top
X6  BM07B-SRSS-TB  [BM07B-SRSS-TB]  37.5,21.39 180 top
X7  BM02B-SRSS-TB  [BM02B-SRSS-TB]  54.41,7 270 top
X8  BM07B-SRSS-TB  [BM07B-SRSS-TB]  62.5,3.61 0 top
X9  BM07B-SRSS-TB  [BM07B-SRSS-TB]  62.5,21.39 180 top
X10  BM02B-SRSS-TB  [BM02B-SRSS-TB]  79.41,7 270 top
X11  BM07B-SRSS-TB  [BM07B-SRSS-TB]  87.5,3.61 0 top
X12  BM07B-SRSS-TB  [BM07B-SRSS-TB]  87.5,21.39 180 top
X13  BM02B-SRSS-TB  [BM02B-SRSS-TB]  4.41,32 270 top
X14  BM07B-SRSS-TB  [BM07B-SRSS-TB]  12.5,28.61 0 top
X15  BM07B-SRSS-TB  [BM07B-SRSS-TB]  12.5,46.39 180 top
X16  BM02B-SRSS-TB  [BM02B-SRSS-TB]  29.41,32 270 top
X17  BM07B-SRSS-TB  [BM07B-SRSS-TB]  37.5,28.61 0 top
X18  BM07B-SRSS-TB  [BM07B-SRSS-TB]  37.5,46.39 180 top
X19  BM02B-SRSS-TB  [BM02B-SRSS-TB]  54.41,32 270 top
X20  BM07B-SRSS-TB  [BM07B-SRSS-TB]  62.5,28.61 0 top
X21  BM07B-SRSS-TB  [BM07B-SRSS-TB]  62.5,46.39 180 top
X22  BM02B-SRSS-TB  [BM02B-SRSS-TB]  79.41,32 270 top
X23  BM07B-SRSS-TB  [BM07B-SRSS-TB]  87.5,28.61 0 top
X24  BM07B-SRSS-TB  [BM07B-SRSS-TB]  87.5,46.39 180 top
X25  BM02B-SRSS-TB  [BM02B-SRSS-TB]  4.41,57 270 top
X26  BM07B-SRSS-TB  [BM07B-SRSS-TB]  12.5,53.61 0 top
X27  BM07B-SRSS-TB  [BM07B-SRSS-TB]  12.5,71.39 180 top
X28  BM02B-SRSS-TB  [BM02B-SRSS-TB]  29.41,57 270 top
X29  BM07B-SRSS-TB  [BM07B-SRSS-TB]  37.5,53.61 0 top
X30  BM07B-SRSS-TB  [BM07B-SRSS-TB]  37.5,71.39 180 top
X31  BM02B-SRSS-TB  [BM02B-SRSS-TB]  54.41,57 270 top
X32  BM07B-SRSS-TB  [BM07B-SRSS-TB]  62.5,53.61 0 top
X33  BM07B-SRSS-TB  [BM07B-SRSS-TB]  62.5,71.39 180 top
X34  BM02B-SRSS-TB  [BM02B-SRSS-TB]  79.41,57 270 top
X35  BM07B-SRSS-TB  [BM07B-SRSS-TB]  87.5,53.61 0 top
X36  BM07B-SRSS-TB  [BM07B-SRSS-TB]  87.5,71.39 180 top
X37  BM02B-SRSS-TB  [BM02B-SRSS-TB]  4.41,82 270 top
X38  BM07B-SRSS-TB  [BM07B-SRSS-TB]  12.5,78.61 0 top
X39  BM07B-SRSS-TB  [BM07B-SRSS-TB]  12.5,96.39 180 top
X40  BM02B-SRSS-TB  [BM02B-SRSS-TB]  29.41,82 270 top
X41  BM07B-SRSS-TB  [BM07B-SRSS-TB]  37.5,78.61 0 top
X42  BM07B-SRSS-TB  [BM07B-SRSS-TB]  37.5,96.39 180 top
X43  BM02B-SRSS-TB  [BM02B-SRSS-TB]  54.41,82 270 top
X44  BM07B-SRSS-TB  [BM07B-SRSS-TB]  62.5,78.61 0 top
X45  BM07B-SRSS-TB  [BM07B-SRSS-TB]  62.5,96.39 180 top
X46  BM02B-SRSS-TB  [BM02B-SRSS-TB]  79.41,82 270 top
X47  BM07B-SRSS-TB  [BM07B-SRSS-TB]  87.5,78.61 0 top
X48  BM07B-SRSS-TB  [BM07B-SRSS-TB]  87.5,96.39 180 top

## Library data of the parts
C1-C128 = rcl; SPICEPREFIX: C
L1-L32 = led
R1 R2 R4-R12 R14-R16 R18-R23 R25-R30 R32-R37 R39-R44 R46-R51 R53-R58 R60-R65 R67-R72 R74-R79 R81-R86 R88-R93 R95-R100 R102-R107 R109-R112 = rcl; SPICEPREFIX: R
R3 R13 R17 R24 R31 R38 R45 R52 R59 R66 R73 R80 R87 R94 R101 R108 = rclCustom; SPICEPREFIX: R
S1-S16 = SparkFun-Retired; PROD_ID: SWCH-08247
TP1-TP320 = SparkFun-Connectors
U1-U16 = ADS; BUILT_BY: EMA_UL_Team; MANUFACTURER_PART_NUMBER: ADS1293CISQ/NOPB; SOURCELIBRARY: TI_2016-05-20; VENDOR: Texas Instruments
U$1-U$16 = crystalCustom; OC_FARNELL: unknown; OC_NEWARK: unknown
X1-X48 = con-JST SH

## Nets
ALARMB: L2.A TP2.1 U1.15
ALARMB1: L3.A TP22.1 U2.15
ALARMB2: L5.A TP42.1 U3.15
ALARMB3: L7.A TP62.1 U4.15
ALARMB4: L9.A TP82.1 U5.15
ALARMB5: L11.A TP102.1 U6.15
ALARMB6: L13.A TP122.1 U7.15
ALARMB7: L15.A TP142.1 U8.15
ALARMB8: L17.A TP162.1 U9.15
ALARMB9: L19.A TP182.1 U10.15
ALARMB10: L21.A TP202.1 U11.15
ALARMB11: L23.A TP222.1 U12.15
ALARMB12: L25.A TP242.1 U13.15
ALARMB13: L27.A TP262.1 U14.15
ALARMB14: L29.A TP282.1 U15.15
ALARMB15: L31.A TP302.1 U16.15
CLK: TP9.1 U1.21 X2.3 X3.3
CLK1: TP29.1 U2.21 X5.3 X6.3
CLK2: TP49.1 U3.21 X8.3 X9.3
CLK3: TP69.1 U4.21 X11.3 X12.3
CLK4: TP89.1 U5.21 X14.3 X15.3
CLK5: TP109.1 U6.21 X17.3 X18.3
CLK6: TP129.1 U7.21 X20.3 X21.3
CLK7: TP149.1 U8.21 X23.3 X24.3
CLK8: TP169.1 U9.21 X26.3 X27.3
CLK9: TP189.1 U10.21 X29.3 X30.3
CLK10: TP209.1 U11.21 X32.3 X33.3
CLK11: TP229.1 U12.21 X35.3 X36.3
CLK12: TP249.1 U13.21 X38.3 X39.3
CLK13: TP269.1 U14.21 X41.3 X42.3
CLK14: TP289.1 U15.21 X44.3 X45.3
CLK15: TP309.1 U16.21 X47.3 X48.3
CMOUT: R14.1 TP12.1 U1.8
CMOUT1: R4.1 TP32.1 U2.8
CMOUT2: R18.1 TP52.1 U3.8
CMOUT3: R25.1 TP72.1 U4.8
CMOUT4: R32.1 TP92.1 U5.8
CMOUT5: R39.1 TP112.1 U6.8
CMOUT6: R46.1 TP132.1 U7.8
CMOUT7: R53.1 TP152.1 U8.8
CMOUT8: R60.1 TP172.1 U9.8
CMOUT9: R67.1 TP192.1 U10.8
CMOUT10: R74.1 TP212.1 U11.8
CMOUT11: R81.1 TP232.1 U12.8
CMOUT12: R88.1 TP252.1 U13.8
CMOUT13: R95.1 TP272.1 U14.8
CMOUT14: R102.1 TP292.1 U15.8
CMOUT15: R109.1 TP312.1 U16.8
CS: TP10.1 U1.16 X1.1
CS1: TP30.1 U2.16 X4.1
CS2: TP50.1 U3.16 X7.1
CS3: TP70.1 U4.16 X10.1
CS4: TP90.1 U5.16 X13.1
CS5: TP110.1 U6.16 X16.1
CS6: TP130.1 U7.16 X19.1
CS7: TP150.1 U8.16 X22.1
CS8: TP170.1 U9.16 X25.1
CS9: TP190.1 U10.16 X28.1
CS10: TP210.1 U11.16 X31.1
CS11: TP230.1 U12.16 X34.1
CS12: TP250.1 U13.16 X37.1
CS13: TP270.1 U14.16 X40.1
CS14: TP290.1 U15.16 X43.1
CS15: TP310.1 U16.16 X46.1
DIN: TP7.1 U1.18 X2.5 X3.5
DIN1: TP27.1 U2.18 X5.5 X6.5
DIN2: TP47.1 U3.18 X8.5 X9.5
DIN3: TP67.1 U4.18 X11.5 X12.5
DIN4: TP87.1 U5.18 X14.5 X15.5
DIN5: TP107.1 U6.18 X17.5 X18.5
DIN6: TP127.1 U7.18 X20.5 X21.5
DIN7: TP147.1 U8.18 X23.5 X24.5
DIN8: TP167.1 U9.18 X26.5 X27.5
DIN9: TP187.1 U10.18 X29.5 X30.5
DIN10: TP207.1 U11.18 X32.5 X33.5
DIN11: TP227.1 U12.18 X35.5 X36.5
DIN12: TP247.1 U13.18 X38.5 X39.5
DIN13: TP267.1 U14.18 X41.5 X42.5
DIN14: TP287.1 U15.18 X44.5 X45.5
DIN15: TP307.1 U16.18 X47.5 X48.5
DOUT: R10.2 TP6.1 X2.4 X3.4
DOUT1: R1.2 TP26.1 X5.4 X6.4
DOUT2: R9.2 TP46.1 X8.4 X9.4
DOUT3: R22.2 TP66.1 X11.4 X12.4
DOUT4: R29.2 TP86.1 X14.4 X15.4
DOUT5: R36.2 TP106.1 X17.4 X18.4
DOUT6: R43.2 TP126.1 X20.4 X21.4
DOUT7: R50.2 TP146.1 X23.4 X24.4
DOUT8: R57.2 TP166.1 X26.4 X27.4
DOUT9: R64.2 TP186.1 X29.4 X30.4
DOUT10: R71.2 TP206.1 X32.4 X33.4
DOUT11: R78.2 TP226.1 X35.4 X36.4
DOUT12: R85.2 TP246.1 X38.4 X39.4
DOUT13: R92.2 TP266.1 X41.4 X42.4
DOUT14: R99.2 TP286.1 X44.4 X45.4
DOUT15: R106.2 TP306.1 X47.4 X48.4
DRDYB: R13.1 TP1.1 U1.20
DRDYB1: R3.1 TP21.1 U2.20
DRDYB2: R17.1 TP41.1 U3.20
DRDYB3: R24.1 TP61.1 U4.20
DRDYB4: R31.1 TP81.1 U5.20
DRDYB5: R38.1 TP101.1 U6.20
DRDYB6: R45.1 TP121.1 U7.20
DRDYB7: R52.1 TP141.1 U8.20
DRDYB8: R59.1 TP161.1 U9.20
DRDYB9: R66.1 TP181.1 U10.20
DRDYB10: R73.1 TP201.1 U11.20
DRDYB11: R80.1 TP221.1 U12.20
DRDYB12: R87.1 TP241.1 U13.20
DRDYB13: R94.1 TP261.1 U14.20
DRDYB14: R101.1 TP281.1 U15.20
DRDYB15: R108.1 TP301.1 U16.20
GND: C12.2 C13.2 C16.2 C19.2 C20.2 L1.A S1.3 S1.4 TP4.1 U1.14 U1.27 U1.29 U$1.1 U$1.2 X2.2 X3.2
GND1: C3.2 C4.2 C6.2 C7.2 C8.2 L4.A S2.3 S2.4 TP24.1 U2.14 U2.27 U2.29 U$2.1 U$2.2 X5.2 X6.2
GND2: C17.2 C18.2 C22.2 C23.2 C24.2 L6.A S3.3 S3.4 TP44.1 U3.14 U3.27 U3.29 U$3.1 U$3.2 X8.2 X9.2
GND3: C27.2 C28.2 C30.2 C31.2 C32.2 L8.A S4.3 S4.4 TP64.1 U4.14 U4.27 U4.29 U$4.1 U$4.2 X11.2 X12.2
GND4: C35.2 C36.2 C38.2 C39.2 C40.2 L10.A S5.3 S5.4 TP84.1 U5.14 U5.27 U5.29 U$5.1 U$5.2 X14.2 X15.2
GND5: C43.2 C44.2 C46.2 C47.2 C48.2 L12.A S6.3 S6.4 TP104.1 U6.14 U6.27 U6.29 U$6.1 U$6.2 X17.2 X18.2
GND6: C51.2 C52.2 C54.2 C55.2 C56.2 L14.A S7.3 S7.4 TP124.1 U7.14 U7.27 U7.29 U$7.1 U$7.2 X20.2 X21.2
GND7: C59.2 C60.2 C62.2 C63.2 C64.2 L16.A S8.3 S8.4 TP144.1 U8.14 U8.27 U8.29 U$8.1 U$8.2 X23.2 X24.2
GND8: C67.2 C68.2 C70.2 C71.2 C72.2 L18.A S9.3 S9.4 TP164.1 U9.14 U9.27 U9.29 U$9.1 U$9.2 X26.2 X27.2
GND9: C75.2 C76.2 C78.2 C79.2 C80.2 L20.A S10.3 S10.4 TP184.1 U10.14 U10.27 U10.29 U$10.1 U$10.2 X29.2 X30.2
GND10: C83.2 C84.2 C86.2 C87.2 C88.2 L22.A S11.3 S11.4 TP204.1 U11.14 U11.27 U11.29 U$11.1 U$11.2 X32.2 X33.2
GND11: C91.2 C92.2 C94.2 C95.2 C96.2 L24.A S12.3 S12.4 TP224.1 U12.14 U12.27 U12.29 U$12.1 U$12.2 X35.2 X36.2
GND12: C99.2 C100.2 C102.2 C103.2 C104.2 L26.A S13.3 S13.4 TP244.1 U13.14 U13.27 U13.29 U$13.1 U$13.2 X38.2 X39.2
GND13: C107.2 C108.2 C110.2 C111.2 C112.2 L28.A S14.3 S14.4 TP264.1 U14.14 U14.27 U14.29 U$14.1 U$14.2 X41.2 X42.2
GND14: C115.2 C116.2 C118.2 C119.2 C120.2 L30.A S15.3 S15.4 TP284.1 U15.14 U15.27 U15.29 U$15.1 U$15.2 X44.2 X45.2
GND15: C123.2 C124.2 C126.2 C127.2 C128.2 L32.A S16.3 S16.4 TP304.1 U16.14 U16.27 U16.29 U$16.1 U$16.2 X47.2 X48.2
IN1: TP18.1 U1.1
IN2: TP35.1 U2.4
IN2.: TP17.1 U1.2
IN2.1: TP37.1 U2.2
IN2.2: TP57.1 U3.2
IN2.3: TP77.1 U4.2
IN2.4: TP97.1 U5.2
IN2.5: TP117.1 U6.2
IN2.6: TP137.1 U7.2
IN2.7: TP157.1 U8.2
IN2.8: TP177.1 U9.2
IN2.9: TP197.1 U10.2
IN2.10: TP217.1 U11.2
IN2.11: TP237.1 U12.2
IN2.12: TP257.1 U13.2
IN2.13: TP277.1 U14.2
IN2.14: TP297.1 U15.2
IN2.15: TP317.1 U16.2
IN3: TP16.1 U1.3
IN4: TP15.1 U1.4
IN5: TP14.1 U1.5
IN6: TP13.1 U1.6
IN7: TP33.1 U2.6
IN8: TP36.1 U2.3
IN9: TP34.1 U2.5
IN10: TP38.1 U2.1
IN11: TP55.1 U3.4
IN12: TP53.1 U3.6
IN13: TP56.1 U3.3
IN14: TP54.1 U3.5
IN15: TP58.1 U3.1
IN16: TP75.1 U4.4
IN17: TP73.1 U4.6
IN18: TP76.1 U4.3
IN19: TP74.1 U4.5
IN20: TP78.1 U4.1
IN21: TP95.1 U5.4
IN22: TP93.1 U5.6
IN23: TP96.1 U5.3
IN24: TP94.1 U5.5
IN25: TP98.1 U5.1
IN26: TP115.1 U6.4
IN27: TP113.1 U6.6
IN28: TP116.1 U6.3
IN29: TP114.1 U6.5
IN30: TP118.1 U6.1
IN31: TP135.1 U7.4
IN32: TP133.1 U7.6
IN33: TP136.1 U7.3
IN34: TP134.1 U7.5
IN35: TP138.1 U7.1
IN36: TP155.1 U8.4
IN37: TP153.1 U8.6
IN38: TP156.1 U8.3
IN39: TP154.1 U8.5
IN40: TP158.1 U8.1
IN41: TP175.1 U9.4
IN42: TP173.1 U9.6
IN43: TP176.1 U9.3
IN44: TP174.1 U9.5
IN45: TP178.1 U9.1
IN46: TP195.1 U10.4
IN47: TP193.1 U10.6
IN48: TP196.1 U10.3
IN49: TP194.1 U10.5
IN50: TP198.1 U10.1
IN51: TP215.1 U11.4
IN52: TP213.1 U11.6
IN53: TP216.1 U11.3
IN54: TP214.1 U11.5
IN55: TP218.1 U11.1
IN56: TP235.1 U12.4
IN57: TP233.1 U12.6
IN58: TP236.1 U12.3
IN59: TP234.1 U12.5
IN60: TP238.1 U12.1
IN61: TP255.1 U13.4
IN62: TP253.1 U13.6
IN63: TP256.1 U13.3
IN64: TP254.1 U13.5
IN65: TP258.1 U13.1
IN66: TP275.1 U14.4
IN67: TP273.1 U14.6
IN68: TP276.1 U14.3
IN69: TP274.1 U14.5
IN70: TP278.1 U14.1
IN71: TP295.1 U15.4
IN72: TP293.1 U15.6
IN73: TP296.1 U15.3
IN74: TP294.1 U15.5
IN75: TP298.1 U15.1
IN76: TP315.1 U16.4
IN77: TP313.1 U16.6
IN78: TP316.1 U16.3
IN79: TP314.1 U16.5
IN80: TP318.1 U16.1
N$1: R11.1 S1.2 U1.25
N$2: L1.C R7.2
N$3: R10.1 U1.19
N$4: C10.2 U1.23 U$1.3
N$5: X4.2
N$6: R1.1 U2.19
N$7: X1.2
N$8: C9.2 U1.24 U$1.4
N$9: C20.1 U1.26
N$10: C2.2 U2.23 U$2.3
N$11: C1.2 U2.24 U$2.4
N$12: C5.1 R4.2 R5.2 U2.10
N$13: L2.C R12.1
N$14: L3.C R2.1
N$15: C11.1 R14.2 R15.2 U1.10
N$16: C8.1 U2.26
N$17: R6.1 S2.2 U2.25
N$18: L4.C R8.2
N$19: X7.2
N$20: R9.1 U3.19
N$21: C15.2 U3.23 U$3.3
N$22: C14.2 U3.24 U$3.4
N$23: C21.1 R18.2 R19.2 U3.10
N$24: L5.C R16.1
N$25: C24.1 U3.26
N$26: R20.1 S3.2 U3.25
N$27: L6.C R21.2
N$28: X10.2
N$29: R22.1 U4.19
N$30: C26.2 U4.23 U$4.3
N$31: C25.2 U4.24 U$4.4
N$32: C29.1 R25.2 R26.2 U4.10
N$33: L7.C R23.1
N$34: C32.1 U4.26
N$35: R27.1 S4.2 U4.25
N$36: L8.C R28.2
N$37: X13.2
N$38: R29.1 U5.19
N$39: C34.2 U5.23 U$5.3
N$40: C33.2 U5.24 U$5.4
N$41: C37.1 R32.2 R33.2 U5.10
N$42: L9.C R30.1
N$43: C40.1 U5.26
N$44: R34.1 S5.2 U5.25
N$45: L10.C R35.2
N$46: X16.2
N$47: R36.1 U6.19
N$48: C42.2 U6.23 U$6.3
N$49: C41.2 U6.24 U$6.4
N$50: C45.1 R39.2 R40.2 U6.10
N$51: L11.C R37.1
N$52: C48.1 U6.26
N$53: R41.1 S6.2 U6.25
N$54: L12.C R42.2
N$55: X19.2
N$56: R43.1 U7.19
N$57: C50.2 U7.23 U$7.3
N$58: C49.2 U7.24 U$7.4
N$59: C53.1 R46.2 R47.2 U7.10
N$60: L13.C R44.1
N$61: C56.1 U7.26
N$62: R48.1 S7.2 U7.25
N$63: L14.C R49.2
N$64: X22.2
N$65: R50.1 U8.19
N$66: C58.2 U8.23 U$8.3
N$67: C57.2 U8.24 U$8.4
N$68: C61.1 R53.2 R54.2 U8.10
N$69: L15.C R51.1
N$70: C64.1 U8.26
N$71: R55.1 S8.2 U8.25
N$72: L16.C R56.2
N$73: X25.2
N$74: R57.1 U9.19
N$75: C66.2 U9.23 U$9.3
N$76: C65.2 U9.24 U$9.4
N$77: C69.1 R60.2 R61.2 U9.10
N$78: L17.C R58.1
N$79: C72.1 U9.26
N$80: R62.1 S9.2 U9.25
N$81: L18.C R63.2
N$82: X28.2
N$83: R64.1 U10.19
N$84: C74.2 U10.23 U$10.3
N$85: C73.2 U10.24 U$10.4
N$86: C77.1 R67.2 R68.2 U10.10
N$87: L19.C R65.1
N$88: C80.1 U10.26
N$89: R69.1 S10.2 U10.25
N$90: L20.C R70.2
N$91: X31.2
N$92: R71.1 U11.19
N$93: C82.2 U11.23 U$11.3
N$94: C81.2 U11.24 U$11.4
N$95: C85.1 R74.2 R75.2 U11.10
N$96: L21.C R72.1
N$97: C88.1 U11.26
N$98: R76.1 S11.2 U11.25
N$99: L22.C R77.2
N$100: X34.2
N$101: R78.1 U12.19
N$102: C90.2 U12.23 U$12.3
N$103: C89.2 U12.24 U$12.4
N$104: C93.1 R81.2 R82.2 U12.10
N$105: L23.C R79.1
N$106: C96.1 U12.26
N$107: R83.1 S12.2 U12.25
N$108: L24.C R84.2
N$109: X37.2
N$110: R85.1 U13.19
N$111: C98.2 U13.23 U$13.3
N$112: C97.2 U13.24 U$13.4
N$113: C101.1 R88.2 R89.2 U13.10
N$114: L25.C R86.1
N$115: C104.1 U13.26
N$116: R90.1 S13.2 U13.25
N$117: L26.C R91.2
N$118: X40.2
N$119: R92.1 U14.19
N$120: C106.2 U14.23 U$14.3
N$121: C105.2 U14.24 U$14.4
N$122: C109.1 R95.2 R96.2 U14.10
N$123: L27.C R93.1
N$124: C112.1 U14.26
N$125: R97.1 S14.2 U14.25
N$126: L28.C R98.2
N$127: X43.2
N$128: R99.1 U15.19
N$129: C114.2 U15.23 U$15.3
N$130: C113.2 U15.24 U$15.4
N$131: C117.1 R102.2 R103.2 U15.10
N$132: L29.C R100.1
N$133: C120.1 U15.26
N$134: R104.1 S15.2 U15.25
N$135: L30.C R105.2
N$136: X46.2
N$137: R106.1 U16.19
N$138: C122.2 U16.23 U$16.3
N$139: C121.2 U16.24 U$16.4
N$140: C125.1 R109.2 R110.2 U16.10
N$141: L31.C R107.1
N$142: C128.1 U16.26
N$143: R111.1 S16.2 U16.25
N$144: L32.C R112.2
RLDOUT: C11.2 R15.1 TP19.1 U1.9
RLDOUT1: C5.2 R5.1 TP39.1 U2.9
RLDOUT2: C21.2 R19.1 TP59.1 U3.9
RLDOUT3: C29.2 R26.1 TP79.1 U4.9
RLDOUT4: C37.2 R33.1 TP99.1 U5.9
RLDOUT5: C45.2 R40.1 TP119.1 U6.9
RLDOUT6: C53.2 R47.1 TP139.1 U7.9
RLDOUT7: C61.2 R54.1 TP159.1 U8.9
RLDOUT8: C69.2 R61.1 TP179.1 U9.9
RLDOUT9: C77.2 R68.1 TP199.1 U10.9
RLDOUT10: C85.2 R75.1 TP219.1 U11.9
RLDOUT11: C93.2 R82.1 TP239.1 U12.9
RLDOUT12: C101.2 R89.1 TP259.1 U13.9
RLDOUT13: C109.2 R96.1 TP279.1 U14.9
RLDOUT14: C117.2 R103.1 TP299.1 U15.9
RLDOUT15: C125.2 R110.1 TP319.1 U16.9
RLDREF: C12.1 TP20.1 U1.11 U1.12
RLDREF1: C3.1 TP40.1 U2.11 U2.12
RLDREF2: C17.1 TP60.1 U3.11 U3.12
RLDREF3: C27.1 TP80.1 U4.11 U4.12
RLDREF4: C35.1 TP100.1 U5.11 U5.12
RLDREF5: C43.1 TP120.1 U6.11 U6.12
RLDREF6: C51.1 TP140.1 U7.11 U7.12
RLDREF7: C59.1 TP160.1 U8.11 U8.12
RLDREF8: C67.1 TP180.1 U9.11 U9.12
RLDREF9: C75.1 TP200.1 U10.11 U10.12
RLDREF10: C83.1 TP220.1 U11.11 U11.12
RLDREF11: C91.1 TP240.1 U12.11 U12.12
RLDREF12: C99.1 TP260.1 U13.11 U13.12
RLDREF13: C107.1 TP280.1 U14.11 U14.12
RLDREF14: C115.1 TP300.1 U15.11 U15.12
RLDREF15: C123.1 TP320.1 U16.11 U16.12
SCLK: TP5.1 U1.17 X2.6 X3.6
SCLK1: TP25.1 U2.17 X5.6 X6.6
SCLK2: TP45.1 U3.17 X8.6 X9.6
SCLK3: TP65.1 U4.17 X11.6 X12.6
SCLK4: TP85.1 U5.17 X14.6 X15.6
SCLK5: TP105.1 U6.17 X17.6 X18.6
SCLK6: TP125.1 U7.17 X20.6 X21.6
SCLK7: TP145.1 U8.17 X23.6 X24.6
SCLK8: TP165.1 U9.17 X26.6 X27.6
SCLK9: TP185.1 U10.17 X29.6 X30.6
SCLK10: TP205.1 U11.17 X32.6 X33.6
SCLK11: TP225.1 U12.17 X35.6 X36.6
SCLK12: TP245.1 U13.17 X38.6 X39.6
SCLK13: TP265.1 U14.17 X41.6 X42.6
SCLK14: TP285.1 U15.17 X44.6 X45.6
SCLK15: TP305.1 U16.17 X47.6 X48.6
SYNCB: TP8.1 U1.13 X2.7 X3.7
SYNCB1: TP28.1 U2.13 X5.7 X6.7
SYNCB2: TP48.1 U3.13 X8.7 X9.7
SYNCB3: TP68.1 U4.13 X11.7 X12.7
SYNCB4: TP88.1 U5.13 X14.7 X15.7
SYNCB5: TP108.1 U6.13 X17.7 X18.7
SYNCB6: TP128.1 U7.13 X20.7 X21.7
SYNCB7: TP148.1 U8.13 X23.7 X24.7
SYNCB8: TP168.1 U9.13 X26.7 X27.7
SYNCB9: TP188.1 U10.13 X29.7 X30.7
SYNCB10: TP208.1 U11.13 X32.7 X33.7
SYNCB11: TP228.1 U12.13 X35.7 X36.7
SYNCB12: TP248.1 U13.13 X38.7 X39.7
SYNCB13: TP268.1 U14.13 X41.7 X42.7
SYNCB14: TP288.1 U15.13 X44.7 X45.7
SYNCB15: TP308.1 U16.13 X47.7 X48.7
VDD: C9.1 C10.1 C13.1 C16.1 C19.1 R7.1 R11.2 R12.2 R13.2 TP3.1 U1.22 U1.28 X2.1 X3.1
VDD1: C1.1 C2.1 C4.1 C6.1 C7.1 R2.2 R3.2 R6.2 R8.1 TP23.1 U2.22 U2.28 X5.1 X6.1
VDD2: C14.1 C15.1 C18.1 C22.1 C23.1 R16.2 R17.2 R20.2 R21.1 TP43.1 U3.22 U3.28 X8.1 X9.1
VDD3: C25.1 C26.1 C28.1 C30.1 C31.1 R23.2 R24.2 R27.2 R28.1 TP63.1 U4.22 U4.28 X11.1 X12.1
VDD4: C33.1 C34.1 C36.1 C38.1 C39.1 R30.2 R31.2 R34.2 R35.1 TP83.1 U5.22 U5.28 X14.1 X15.1
VDD5: C41.1 C42.1 C44.1 C46.1 C47.1 R37.2 R38.2 R41.2 R42.1 TP103.1 U6.22 U6.28 X17.1 X18.1
VDD6: C49.1 C50.1 C52.1 C54.1 C55.1 R44.2 R45.2 R48.2 R49.1 TP123.1 U7.22 U7.28 X20.1 X21.1
VDD7: C57.1 C58.1 C60.1 C62.1 C63.1 R51.2 R52.2 R55.2 R56.1 TP143.1 U8.22 U8.28 X23.1 X24.1
VDD8: C65.1 C66.1 C68.1 C70.1 C71.1 R58.2 R59.2 R62.2 R63.1 TP163.1 U9.22 U9.28 X26.1 X27.1
VDD9: C73.1 C74.1 C76.1 C78.1 C79.1 R65.2 R66.2 R69.2 R70.1 TP183.1 U10.22 U10.28 X29.1 X30.1
VDD10: C81.1 C82.1 C84.1 C86.1 C87.1 R72.2 R73.2 R76.2 R77.1 TP203.1 U11.22 U11.28 X32.1 X33.1
VDD11: C89.1 C90.1 C92.1 C94.1 C95.1 R79.2 R80.2 R83.2 R84.1 TP223.1 U12.22 U12.28 X35.1 X36.1
VDD12: C97.1 C98.1 C100.1 C102.1 C103.1 R86.2 R87.2 R90.2 R91.1 TP243.1 U13.22 U13.28 X38.1 X39.1
VDD13: C105.1 C106.1 C108.1 C110.1 C111.1 R93.2 R94.2 R97.2 R98.1 TP263.1 U14.22 U14.28 X41.1 X42.1
VDD14: C113.1 C114.1 C116.1 C118.1 C119.1 R100.2 R101.2 R104.2 R105.1 TP283.1 U15.22 U15.28 X44.1 X45.1
VDD15: C121.1 C122.1 C124.1 C126.1 C127.1 R107.2 R108.2 R111.2 R112.1 TP303.1 U16.22 U16.28 X47.1 X48.1
WCT: TP11.1 U1.7
WCT1: TP31.1 U2.7
WCT2: TP51.1 U3.7
WCT3: TP71.1 U4.7
WCT4: TP91.1 U5.7
WCT5: TP111.1 U6.7
WCT6: TP131.1 U7.7
WCT7: TP151.1 U8.7
WCT8: TP171.1 U9.7
WCT9: TP191.1 U10.7
WCT10: TP211.1 U11.7
WCT11: TP231.1 U12.7
WCT12: TP251.1 U13.7
WCT13: TP271.1 U14.7
WCT14: TP291.1 U15.7
WCT15: TP311.1 U16.7

## Tracks (layer width: path | path; a pad name or v marks a point on that pad's centre or on a via)
ALARMB
  Top 0.152: U1.15 6,10.3 | 6,10.3 L2.A | TP2.1 6,10.3
ALARMB1
  Top 0.152: U2.15 31,10.3 | 31,10.3 L3.A | TP22.1 31,10.3
ALARMB2
  Top 0.152: U3.15 56,10.3 | 56,10.3 L5.A | TP42.1 56,10.3
ALARMB3
  Top 0.152: U4.15 81,10.3 | 81,10.3 L7.A | TP62.1 81,10.3
ALARMB4
  Top 0.152: U5.15 6,35.3 | 6,35.3 L9.A | TP82.1 6,35.3
ALARMB5
  Top 0.152: U6.15 31,35.3 | 31,35.3 L11.A | TP102.1 31,35.3
ALARMB6
  Top 0.152: U7.15 56,35.3 | 56,35.3 L13.A | TP122.1 56,35.3
ALARMB7
  Top 0.152: U8.15 81,35.3 | 81,35.3 L15.A | TP142.1 81,35.3
ALARMB8
  Top 0.152: U9.15 6,60.3 | 6,60.3 L17.A | TP162.1 6,60.3
ALARMB9
  Top 0.152: U10.15 31,60.3 | 31,60.3 L19.A | TP182.1 31,60.3
ALARMB10
  Top 0.152: U11.15 56,60.3 | 56,60.3 L21.A | TP202.1 56,60.3
ALARMB11
  Top 0.152: U12.15 81,60.3 | 81,60.3 L23.A | TP222.1 81,60.3
ALARMB12
  Top 0.152: U13.15 6,85.3 | 6,85.3 L25.A | TP242.1 6,85.3
ALARMB13
  Top 0.152: U14.15 31,85.3 | 31,85.3 L27.A | TP262.1 31,85.3
ALARMB14
  Top 0.152: U15.15 56,85.3 | 56,85.3 L29.A | TP282.1 56,85.3
ALARMB15
  Top 0.152: U16.15 81,85.3 | 81,85.3 L31.A | TP302.1 81,85.3
CLK  (via drill 0.3)
  Top 0.152: U1.21 13.1,10 13.55,9.55 13.55,7.47 14,7.01 14,6 13.5,5.5 13.5,5 | v13.5,2.2 X2.3 13.5,5 | v11.5,23.3 X3.3 | TP9.1 13.5,5
  Bottom 0.152: v13.5,2.2 12.48,3.22 12.48,22.28 12.9,22.7 12.9,23 12.6,23.3 v11.5,23.3
CLK1  (via drill 0.3)
  Top 0.152: U2.21 38.1,10 38.55,9.55 38.55,7.47 39,7.01 39,6 38.5,5.5 38.5,5 | v38.5,2.2 X5.3 38.5,5 | v36.5,23.3 X6.3 | TP29.1 38.5,5
  Bottom 0.152: v38.5,2.2 37.48,3.22 37.48,22.28 37.9,22.7 37.9,23 37.6,23.3 v36.5,23.3
CLK2  (via drill 0.3)
  Top 0.152: U3.21 63.1,10 63.55,9.55 63.55,7.47 64,7.01 64,6 63.5,5.5 63.5,5 | v63.5,2.2 X8.3 63.5,5 | v61.5,23.3 X9.3 | TP49.1 63.5,5
  Bottom 0.152: v63.5,2.2 62.48,3.22 62.48,22.28 62.9,22.7 62.9,23 62.6,23.3 v61.5,23.3
CLK3  (via drill 0.3)
  Top 0.152: U4.21 88.1,10 88.55,9.55 88.55,7.47 89,7.01 89,6 88.5,5.5 88.5,5 | v88.5,2.2 X11.3 88.5,5 | v86.5,23.3 X12.3 | TP69.1 88.5,5
  Bottom 0.152: v88.5,2.2 87.48,3.22 87.48,22.28 87.9,22.7 87.9,23 87.6,23.3 v86.5,23.3
CLK4  (via drill 0.3)
  Top 0.152: U5.21 13.1,35 13.55,34.55 13.55,32.47 14,32.01 14,31 13.5,30.5 13.5,30 | v13.5,27.2 X14.3 13.5,30 | v11.5,48.3 X15.3 | TP89.1 13.5,30
  Bottom 0.152: v13.5,27.2 12.48,28.22 12.48,47.28 12.9,47.7 12.9,48 12.6,48.3 v11.5,48.3
CLK5  (via drill 0.3)
  Top 0.152: U6.21 38.1,35 38.55,34.55 38.55,32.47 39,32.01 39,31 38.5,30.5 38.5,30 | v38.5,27.2 X17.3 38.5,30 | v36.5,48.3 X18.3 | TP109.1 38.5,30
  Bottom 0.152: v38.5,27.2 37.48,28.22 37.48,47.28 37.9,47.7 37.9,48 37.6,48.3 v36.5,48.3
CLK6  (via drill 0.3)
  Top 0.152: U7.21 63.1,35 63.55,34.55 63.55,32.47 64,32.01 64,31 63.5,30.5 63.5,30 | v63.5,27.2 X20.3 63.5,30 | v61.5,48.3 X21.3 | TP129.1 63.5,30
  Bottom 0.152: v63.5,27.2 62.48,28.22 62.48,47.28 62.9,47.7 62.9,48 62.6,48.3 v61.5,48.3
CLK7  (via drill 0.3)
  Top 0.152: U8.21 88.1,35 88.55,34.55 88.55,32.47 89,32.01 89,31 88.5,30.5 88.5,30 | v88.5,27.2 X23.3 88.5,30 | v86.5,48.3 X24.3 | TP149.1 88.5,30
  Bottom 0.152: v88.5,27.2 87.48,28.22 87.48,47.28 87.9,47.7 87.9,48 87.6,48.3 v86.5,48.3
CLK8  (via drill 0.3)
  Top 0.152: U9.21 13.1,60 13.55,59.55 13.55,57.47 14,57.01 14,56 13.5,55.5 13.5,55 | v13.5,52.2 X26.3 13.5,55 | v11.5,73.3 X27.3 | TP169.1 13.5,55
  Bottom 0.152: v13.5,52.2 12.48,53.22 12.48,72.28 12.9,72.7 12.9,73 12.6,73.3 v11.5,73.3
CLK9  (via drill 0.3)
  Top 0.152: U10.21 38.1,60 38.55,59.55 38.55,57.47 39,57.01 39,56 38.5,55.5 38.5,55 | v38.5,52.2 X29.3 38.5,55 | v36.5,73.3 X30.3 | TP189.1 38.5,55
  Bottom 0.152: v38.5,52.2 37.48,53.22 37.48,72.28 37.9,72.7 37.9,73 37.6,73.3 v36.5,73.3
CLK10  (via drill 0.3)